# Altium PCB k02-breakout.PcbDoc
Units mil, origin at the board's own origin, x right, y up, seen from the top; angles counter-clockwise.
Board outline 600 x 2000 mil, 2 copper layers (Top Layer, Bottom Layer); 17 components, 47 nets, 130 pads, 92 vias.
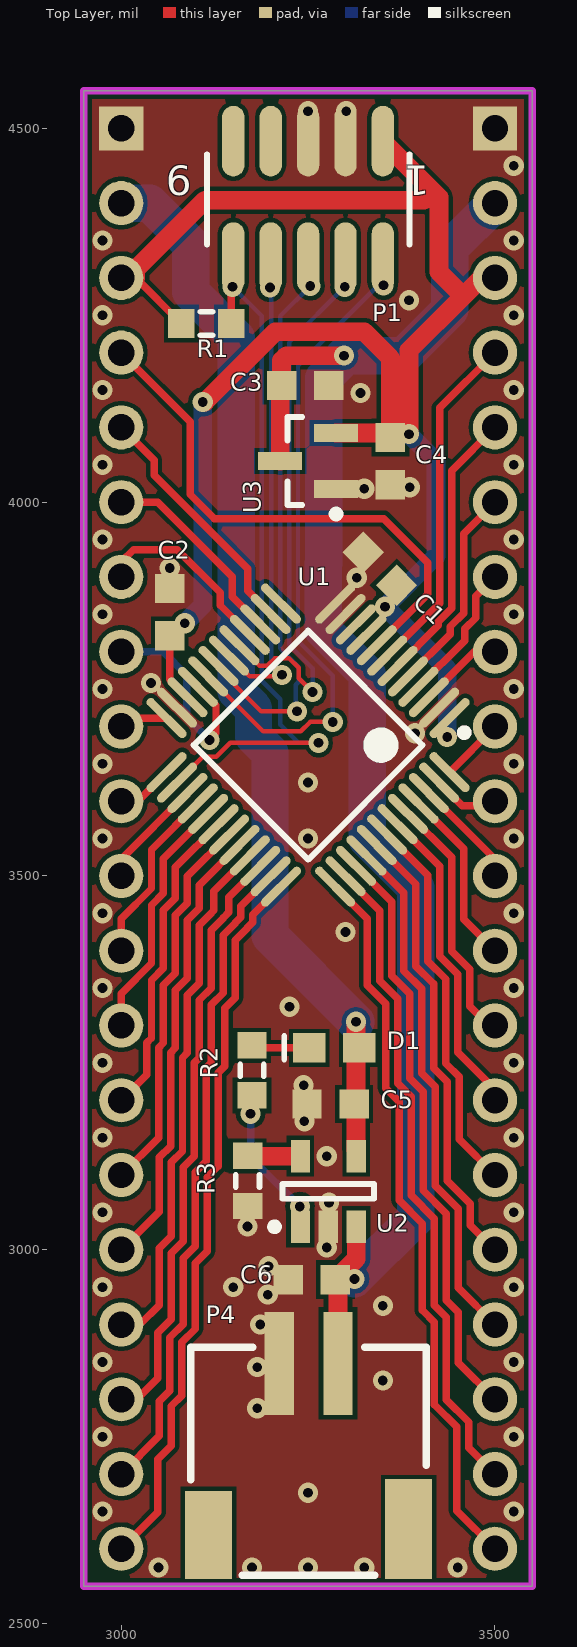
[diagram p0: Top Layer view]
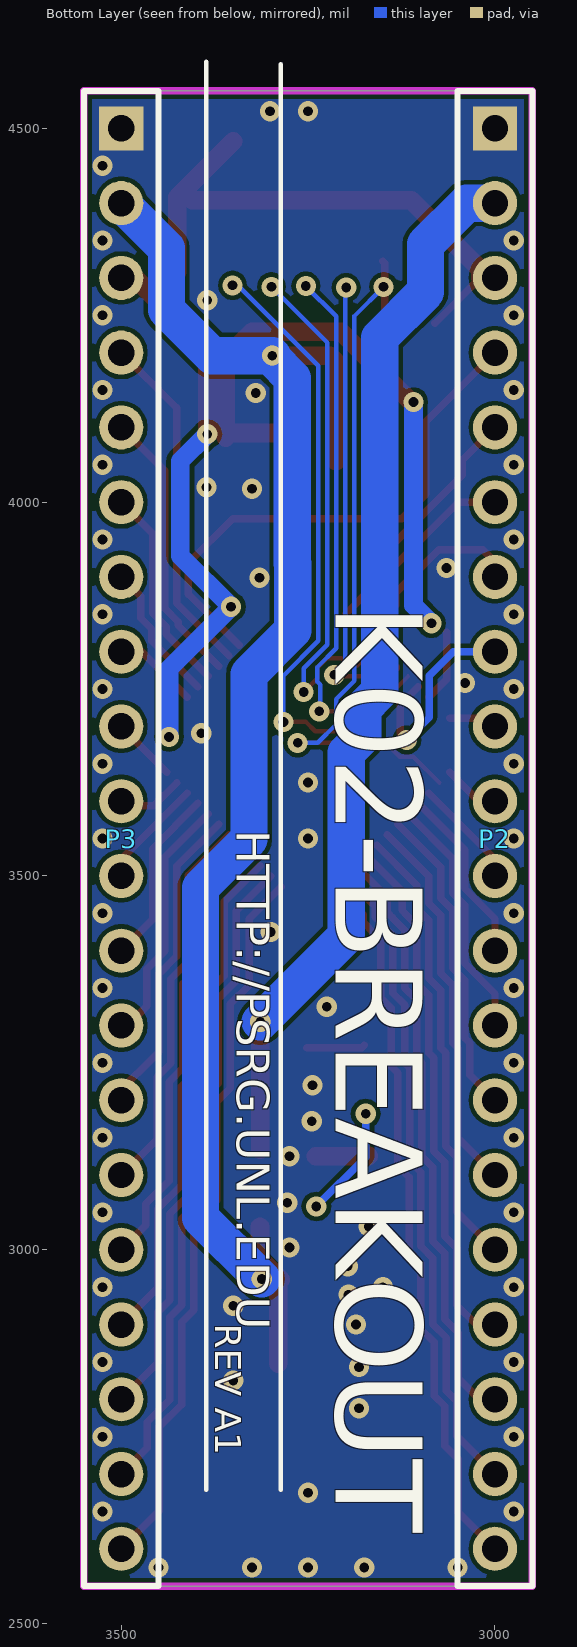
[diagram p1: Bottom Layer view, seen from below]
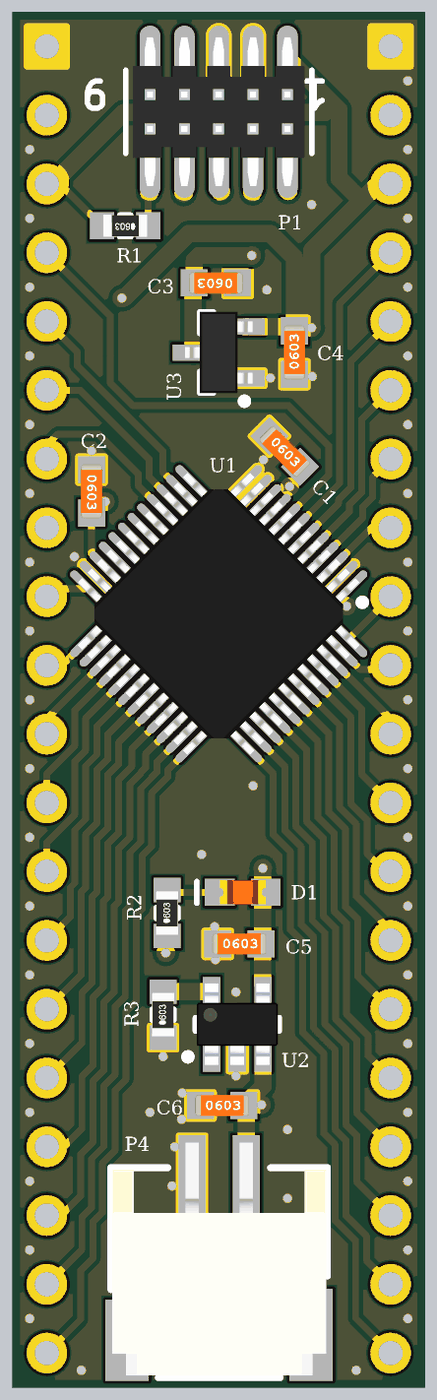
[diagram p2: 3D render of the assembled board from above, using the file's embedded part models]

## Layer stack, top to bottom
Top Solder: solder mask 0.4, Solder Resist, Dk 3.5
Top Layer: signal copper 1.4
Dielectric 1: dielectric 12.6, FR-4, Dk 4.8
Bottom Layer: signal copper 1.4
Bottom Solder: solder mask 0.4, Solder Resist, Dk 3.5

## Board outline
2950,2550 3550,2550 3550,4550 2950,4550

## Design rules (kind name [scope] priority, off if disabled: settings)
Clearance [All] p1: gap=6
PolygonConnect [All] p1: connectstyle=Direct reliefconductorwidth=10 reliefentries=4 polygonreliefangle="90 Angle" airgapwidth=10
RoutingVias [All] p1: holewidth=13 width=27 viastyle="Through Hole" minholewidth=13 minwidth=27 maxholewidth=28 maxwidth=50
SolderMaskExpansion [All] p1: expansion=4
Width [All] p1: maxlimit=200 minlimit=6 preferedwidth=10
30 further rules are at their usual default settings.

## Components (designator, comment, footprint, x,y, rotation, side; value= is the part's Value field where it differs from the comment)
C1 "100n" CAPC1608N 3346,3911 r315 top
C2 "100n" CAPC1608N 3065,3853 r270 top
C3 "4u7" CAPC1608N 3246,4156 r180 top
C4 "10u" CAPC1608N 3360,4055 r90 top
C5 "4u7" CAPC1608N 3280,3195 r0 top
C6 "4u7" CAPC1608N 3255,2960 r0 top
D1 "RED" LTST-C190EKT 3285,3270 r180 top
P1 "MHDR2X5" MHDR2X5SMD 3350,4430 r180 top
P2 "Header 20" HDR1X20 3000,4500 r270 bottom
P3 "Header 20" HDR1X20 3500,4500 r270 bottom
P4 "Header 2" S2B-PH-SM4-TB 3290,2840 r180 top
R1 "1k" RESC1608N 3114,4239 r180 top
R2 "1k" RESC1608N 3175,3240 r90 top
R3 "2k" RESC1608N 3169,3092 r90 top
U1 "MK02FN128VLF10" TSQFP50P900X900-48N 3250,3675 r225 top
U2 "MCP73831T-2ACI/OT" SOT23-5AN 3277,3078 r90 top
U3 "MCP1703T-3302E/CB" SOT23-3N 3250,4055 r180 top

## Footprints (in the part's own frame and the unit in brackets; to place one, negate y for a bottom-side part, rotate by r counter-clockwise, add the part's x,y. Pads: shape width x height; smd on the part's side, far side on the other; paste and mask are expansions set on the pad)
CAPC1608N [mm] "Chip Capacitor (0603), Body 1.6x0.8mm, IPC Medium Density"
  rect 1x1 smd: 1(-0.8,0) 2(0.8,0)
  body extent -1,-0.39 1,0.39, height 0.79
HDR1X20 [mm] "Connector; Header; 20 Position"
  rect 1.5x1.5 hole 0.9: 1(0,0)
  round 1.5 hole 0.9: 2(2.54,0) 3(5.08,0) 4(7.62,0) 5(10.16,0) 6(12.7,0) 7(15.24,0) 8(17.78,0) 9(20.32,0) 10(22.86,0) 11(25.4,0) 12(27.94,0) 13(30.48,0) 14(33.02,0) 15(35.56,0) 16(38.1,0) 17(40.64,0) 18(43.18,0) 19(45.72,0) 20(48.26,0)
  silkscreen extent -1.27,-1.27 49.53,1.27
LTST-C190EKT [mm] "Red LED, 0603"
  rect 1.1x1 smd: 1(-0.85,0) 2(0.85,0)
  silkscreen extent 1.7,-0.4 1.7,0.4, body extent -0.85,-0.45 0.85,0.45, height 0.9
MHDR2X5SMD [mm] "Connector; Header; 5x2 Position"
  oval 0.76x2.4 smd: 1(0,-1.343) 2(0,2.613) 3(1.27,-1.343) 4(1.27,2.613) 5(2.54,-1.343) 6(2.54,2.613) 7(3.81,-1.343) 8(3.81,2.613) 9(5.08,-1.343) 10(5.08,2.613)
  silkscreen extent -0.9,-0.9 5.98,2.17, body extent -0.63,-2.11 5.71,3.39, height 5.4
RESC1608N [mm] "Chip Resistor, Body 1.6x0.8mm, IPC Medium Density"
  rect 0.9x1 smd: 1(-0.85,0) 2(0.85,0)
  silkscreen extent -0.2,-0.4 0.2,0.4, body extent -0.8,-0.41 0.8,0.41, height 0.45
S2B-PH-SM4-TB [mm]
  rect 1.6x3.4 smd: 0(-2.4,5.425)
  rect 1.6x3 smd: 0(4.4,5.625)
  rect 1x3.5 smd: 1(0,-0.2) 2(2,-0.2)
  silkscreen extent -3,-0.75 5,7, body extent -2.95,-1.67 4.95,6.93, height 5.6
SOT23-3N [mm] "SOT23, 3-Leads, Body 2.9x1.3mm, Pitch 0.95mm, Lead Span 2.5mm, IPC Medium Density"
  rect 1.5x0.6 smd: 1(-0.95,0.95) 2(-0.95,-0.95) 3(0.95,0)
  silkscreen extent -1.07,-1.5 0.7,1.92, body extent -1.25,-1.5 1.25,1.5, height 0.95
SOT23-5AN [mm] "SOT23, 5-Leads, Body 2.9x1.6mm, Pitch 0.95mm, Lead Span 2.8mm, IPC Medium Density"
  rect 1.1x0.65 smd: 1(-1.2,0.95) 2(-1.2,0) 3(-1.2,-0.95) 4(1.2,-0.95) 5(1.2,0.95)
  silkscreen extent -1.32,-1.55 0.25,1.95, body extent -1.5,-1.5 1.5,1.5, height 1.3
TSQFP50P900X900-48N [mm] "Thin QFP, 48-Leads, Body 7x7mm, Pitch 0.5mm, IPC Medium Density"
  oval 1.8x0.3 smd: 1(-4.05,2.75) 2(-4.05,2.25) 3(-4.05,1.75) 4(-4.05,1.25) 5(-4.05,0.75) 6(-4.05,0.25) 7(-4.05,-0.25) 8(-4.05,-0.75) 9(-4.05,-1.25) 10(-4.05,-1.75) 11(-4.05,-2.25) 12(-4.05,-2.75) 25(4.05,-2.75) 26(4.05,-2.25) 27(4.05,-1.75) 28(4.05,-1.25) 29(4.05,-0.75) 30(4.05,-0.25) 31(4.05,0.25) 32(4.05,0.75) 33(4.05,1.25) 34(4.05,1.75) 35(4.05,2.25) 36(4.05,2.75)
  oval 0.3x1.8 smd: 13(-2.75,-4.05) 14(-2.25,-4.05) 15(-1.75,-4.05) 16(-1.25,-4.05) 17(-0.75,-4.05) 18(-0.25,-4.05) 19(0.25,-4.05) 20(0.75,-4.05) 21(1.25,-4.05) 22(1.75,-4.05) 23(2.25,-4.05) 24(2.75,-4.05) 37(2.75,4.05) 38(2.25,4.05) 39(1.75,4.05) 40(1.25,4.05) 41(0.75,4.05) 42(0.25,4.05) 43(-0.25,4.05) 44(-0.75,4.05) 45(-1.25,4.05) 46(-1.75,4.05) 47(-2.25,4.05) 48(-2.75,4.05)
  silkscreen extent -4.17,-2.75 2.75,3.57, body extent -4.5,-4.5 4.5,4.5, height 1.45

## Part data
C1 C2 C4: library part "Cap Semi", "Capacitor (Semiconductor SIM Model)"
C3 C5 C6: library part "Cap Semi", "CAP SEMI 4U7 10V 0603"
D1: library part LED_GREEN, "Typical greenGaAs LED"
P1: "Header, 5-Pin, Dual row"
P2 P3: "Header, 20-Pin"
P4: "Header, 2-Pin"
R1 R2 R3: library part "Res Semi", "Semiconductor Resistor"
U1: "IC MCU ARM 100MHz 128KB FLASH LQFP48"
U2: "IC CONTROLLR LI-ION 4.2V SOT23-5"
U3: "IC REG LDO 3.3V 0.25A SOT23A-3"

## Via types
v1: diameter 27, hole 13, Top Layer to Bottom Layer, tented both sides, 92 vias

## Nets (pads, with @x,y where several pads share a name; then routed paths per layer and width w, separated by ;. In a path a pad name is that pad's centre, name@x,y a point inside that pad or via, vN(x,y) a via of type N, cw(c..) or ccw(c..) an arc to the next point about the centre after c; other vN are vias at no path point)
3V3: C1.2 C2.2 C4.2 P1.1 P2.3 P3.3 R1.2 U1.1 U1.9 U1.10 U1.22 U3.2 | length 2431.6
  Top Layer w10: P2.3 3019.54,4300 R1.2 ; C2.2@3064.67,3826.17 3064.67,3762.89 U1.22
  Top Layer w25: P2.3@3019.54,4300 3019.54,4311.54 3112,4404 3405,4404 ; v1(3109,4134) 3112,4134 3206,4228 3325,4228 3360,4193 C4.2 3354.09,4092.4 U3.2 ; P1.1 3425,4407.87 3425,4308 3457.5,4275.5 ; v1(3385,4091) 3385,4203 3457.5,4275.5 ; P3.3 3482,4300 3457.5,4275.5
  Bottom Layer w25: v1(3085,3838) 3109,3862 v1(3109,4134) ; v1(3385,4091) 3421,4055 3421,3928 v1(3353,3860) 3436,3777 v1(3436,3686)
5V: C5.2 D1.1 P2.2 U2.4 | length 1418.5
  Top Layer w25: U2.4@3314,3133.84 v1(3314,3305)
  Bottom Layer w50: P2.2 3038,4400 3093,4345 3093,4281.07 3154,4220.07 3154,3747 3177,3724 3177,3687 3199,3665 3199,3420 v1(3314,3305)
ADC0_DM0: P2.4 U1.8 | length 721.9
  Top Layer w10: P2.4 3092.5,4107.5 3092.5,4010.27 3124.77,3978 3351,3978 3410,3919 3410,3876.76 U1.8
ADC0_DP0: P3.4 U1.7 | length 465
  Top Layer w10: U1.7 3426,3864.92 3426,4126 P3.4
DAC0_OUT: P2.5 U1.14 | length 332.4
  Top Layer w10: P2.5 3044,4056 3044,4036.14 3169,3911.14 3169,3881.27 U1.14
GND: C1.1 C2.1 C3.1 C4.1 C5.1 C6.1 P1.3 P1.5 P2.1 P3.1 P4.2 R3.1 U1.2 U1.11 U1.12 U1.23 U2.2 U3.1
  other v1: 3050,2575 3175,2575 3250,2575 3325,2575 3450,2575 2975,2650 3525,2650 3250,2675 2975,2750 3525,2750 3182,2788 3350,2825 3182,2843 2975,2850 3525,2850 3186,2900 3350,2925 3196,2940 2975,2950 3150,2950 3525,2950 3197,2978 3275,3003 3169,3031 2975,3050 3525,3050 3278,3063 3275,3125 2975,3150 3525,3150 3245,3172 3244,3220 2975,3250 3525,3250 3225,3325 2975,3350 3525,3350 3300,3425 2975,3450 3525,3450 2975,3550 3250,3550 3525,3550 3250,3625 2975,3650 3525,3650 3393,3691 2975,3750 3525,3750 3040,3758 2975,3850 3525,3850 3315,3899 3065,3912 2975,3950 3525,3950 3325,4018 3386,4020 2975,4050 3525,4050 3320,4146 2975,4150 3525,4150 2975,4250 3525,4250 3385,4270 2975,4350 3525,4350 3525,4450 3250,4523 3301,4523
JTAG_TCK: P1.4 U1.17 | length 727
  Top Layer w6: U1.17 3158.13,3807.87 3185,3781 3195.18,3781 3205.68,3791.5 3224.32,3791.5 3237.5,3778.32 3237.5,3764.5 v1(3256,3746)
  Bottom Layer w6: v1(3256,3746) 3256,3777.95 3224.5,3809.45 3224.5,4213.5 v1(3299,4288)
JTAG_TDI: P1.8 U1.18 | length 579.9
  Top Layer w6: U1.18@3164,3775 3172.16,3766.84 3212.84,3766.84 v1(3215,3769)
  Bottom Layer w6: v1(3199,4287) 3200.5,4285.5 3200.5,3783.5 v1(3215,3769)
JTAG_TDO: P1.6 U1.19 | length 730.6
  Top Layer w6: U1.19 3130.29,3776.89 3187.01,3720.17 v1(3235.17,3720.17)
  Bottom Layer w6: v1(3235.17,3720.17) 3233.5,3721.83 3233.5,3755.68 3237.5,3759.68 3237.5,3779.48 3212.5,3804.48 3212.5,4248.5 v1(3253,4289)
JTAG_TMS: P1.2 U1.20 | length 857
  Top Layer w6: U1.20 3189.74,3693.5 3240.32,3693.5 3252.82,3706 v1(3283,3706)
  Bottom Layer w6: v1(3283,3706) 3283,3767.92 3236.5,3814.42 3236.5,4182.58 3343.92,4290 v1(3351,4290)
NetD1_2: D1.2 R2.2 | length 78
  Top Layer w10: R2.2 3178.46,3270 D1.2
NetR2_1: R2.1 U2.1 | length 151.3
  Bottom Layer w10: v1(3173,3182) 3173,3124 v1(3239,3058)
NetR3_2: R3.2 U2.5 | length 70.7
  Top Layer w25: R3.2 3169.22,3125.24 U2.5
PTA4: P2.8 U1.21 | length 284.4
  Top Layer w10: U1.21 3126.8,3728.6 3126.8,3690.8 v1(3118,3682)
  Bottom Layer w10: P2.8 3056,3800 3088,3768 3088,3712 v1(3118,3682)
PTA18: P2.9 U1.24 | length 65.3
  Top Layer w10: P2.9 3011.19,3711.19 U1.24
PTA19: P2.10 U1.25 | length 76.8
  Top Layer w10: P2.10 3021.89,3600 U1.25
PTB0: P2.11 U1.27 | length 147.6
  Top Layer w10: P2.11 3000,3522.44 U1.27
PTB1: P2.12 U1.28 | length 239.5
  Top Layer w10: P2.12 3000,3442.69 3040.53,3483.21 3040.53,3529.91 3040.53,3535.12 U1.28
PTB2: P2.13 U1.29 | length 331.3
  Top Layer w10: P2.13 3000,3342.69 3040.53,3383.21 3040.53,3460.59 3056.53,3476.59 3056.53,3523.29 U1.29
PTB3: P2.14 U1.30 | length 423.2
  Top Layer w10: P2.14 3034,3234 3034,3276.69 3040.53,3283.21 3040.53,3360.59 3056.53,3376.59 3056.53,3453.96 3072.53,3469.96 3072.53,3511.45 U1.30
PTB4: P2.15 U1.31 | length 515
  Top Layer w10: P2.15 3050,3150 3050,3270.06 3056.53,3276.59 3056.53,3353.96 3072.53,3369.96 3072.53,3447.33 3088.53,3463.33 3088.53,3499.61 U1.31
PTB5: P2.16 U1.32 | length 606.9
  Top Layer w10: P2.16 3051,3051 3051,3123.51 3066,3138.51 3066,3263.43 3072.53,3269.96 3072.53,3347.33 3088.53,3363.33 3088.53,3440.7 3104.53,3456.7 3104.53,3487.77 U1.32
PTC0: P2.17 U1.33 | length 713.4
  Top Layer w10: P2.17 3025,2900 3051,2926 3051,3001.88 3067,3017.88 3067,3116.88 3082,3131.88 3082,3256.8 3088.53,3263.33 3088.53,3340.7 3104.53,3356.7 3104.53,3434.08 3120.53,3450.08 3120.53,3450.41 3124,3453.88 3124,3479.4 U1.33
PTC1: P2.18 U1.34 | length 802.9
  Top Layer w10: P2.18 3021,2800 3049,2828 3049,2889.25 3067,2907.25 3067,2995.25 3083,3011.25 3083,3110.25 3098,3125.25 3098,3250.18 3104.53,3256.7 3104.53,3334.08 3120.53,3350.08 3120.53,3427.45 3136.53,3443.45 3136.53,3443.78 3144,3451.25 3144,3471.56 U1.34
PTC2: P2.19 U1.35 | length 882.4
  Top Layer w10: P2.19 3051,2751 3051,2797.63 3065,2811.63 3065,2882.63 3083,2900.63 3083,2988.63 3099,3004.63 3099,3103.63 3114,3118.63 3114,3243.55 3120.53,3250.08 3120.53,3327.45 3136.53,3343.45 3136.53,3420.82 3152.53,3436.82 3152.53,3437.16 3160,3444.63 3160,3459.73 U1.35
PTC3: P2.20 U1.36 | length 974.3
  Top Layer w10: P2.20 3049,2649 3049,2720 3067,2738 3067,2791 3081,2805 3081,2876 3099,2894 3099,2982 3115,2998 3115,3097 3130,3112 3130,3236.92 3138.62,3245.54 3138.62,3322.91 3152.53,3336.82 3152.53,3414.19 3168.53,3430.19 3168.53,3430.53 3176,3438 3176,3447.89 U1.36
PTC4: P3.20 U1.37 | length 974.3
  Top Layer w10: U1.37 3329,3442.89 3329,3354 3354,3329 3354,3216 3372,3198 3372,3066 3403,3035 3403,2919 3419,2903 3419,2793 3449,2763 3449,2651 P3.20
PTC5: P3.19 U1.38 | length 882.4
  Top Layer w10: U1.38 3346,3453.73 3346,3359.63 3370,3335.63 3370,3222.63 3388,3204.63 3388,3072.63 3419,3041.63 3419,2925.63 3435,2909.63 3435,2799.63 3465,2769.63 3465,2735 P3.19
PTC6: P3.18 U1.39 | length 790.6
  Top Layer w10: U1.39 3362,3465.56 3362,3366.25 3386,3342.25 3386,3229.25 3404,3211.25 3404,3079.25 3435,3048.25 3435,2932.25 3451,2916.25 3451,2849 P3.18
PTC7: P3.17 U1.40 | length 698.7
  Top Layer w10: U1.40 3378,3477.4 3378,3372.88 3402,3348.88 3402,3235.88 3420,3217.88 3420,3085.88 3451,3054.88 3451,2949 P3.17
PTD0: P3.16 U1.41 | length 606.9
  Top Layer w10: U1.41 3394,3489.24 3394,3379.51 3418,3355.51 3418,3242.51 3436,3224.51 3436,3092.51 3467,3061.51 3467,3033 P3.16
PTD1: P3.15 U1.42 | length 515
  Top Layer w10: U1.42 3410,3501.08 3410,3386.14 3434,3362.14 3434,3249.14 3452,3231.14 3452,3148 P3.15
PTD2: P3.14 U1.43 | length 429.1
  Top Layer w10: U1.43 3426,3512.92 3426,3392.76 3450,3368.76 3450,3264.37 3507.19,3207.19 P3.14
PTD3: P3.13 U1.44 | length 336
  Top Layer w10: U1.44 3442,3524.76 3442,3399.39 3466,3375.39 3466,3326 3492,3300 P3.13
PTD4: P3.12 U1.45 | length 239.5
  Top Layer w10: U1.45 3458,3536.6 3458,3442 P3.12
PTD5: P3.11 U1.46 | length 147.6
  Top Layer w10: U1.46 3500,3522.44 P3.11
PTD6: P3.10 U1.47 | length 89.9
  Top Layer w10: U1.47 3456.27,3594 3494,3594 P3.10
PTD7: P3.9 U1.48 | length 86.3
  Top Layer w10: U1.48 3500,3699.51 P3.9
PTE16: P3.8 U1.3 | length 113.8
  Top Layer w10: U1.3 3472.44,3800 P3.8
PTE17: P3.7 U1.4 | length 189.5
  Top Layer w10: U1.4 3459.47,3814.88 3459.47,3830.51 3474,3845.04 3474,3874 P3.7
PTE18: P3.6 U1.5 | length 281.3
  Top Layer w10: U1.5 3440,3823.24 3440,3833.66 3458,3851.66 3458,3958 P3.6
PTE19: P3.5 U1.6 | length 373.2
  Top Layer w10: U1.6 3424,3835.08 3424,3840.29 3442,3858.29 3442,4042 P3.5
PTE24: P2.6 U1.15 | length 269.2
  Top Layer w10: P2.6 3048.83,4000 3148.8,3900.03 3148.8,3873.64 U1.15
PTE25: P2.7 U1.16 | length 256.1
  Top Layer w10: P2.7 3000,3920 3016.5,3936.5 3075.15,3936.5 3132.8,3878.85 3132.8,3861.8 U1.16
RESET: P1.10 R1.1 U1.26 | length 968.9
  Top Layer w6: U1.26 3109.23,3659.5 3127.32,3659.5 3145.82,3678 v1(3264,3678)
  Top Layer w10: R1.1 3147.46,4319.59 P1.10@3150,4322.13
  Bottom Layer w6: v1(3149,4288) 3188,4249 3188,3761.08 3212.67,3736.42 3212.67,3702.51 3237.18,3678 v1(3264,3678)
VBAT: C3.2 C6.2 P3.2 P4.1 U2.3 U3.3 | length 2089.7
  Top Layer w25: U3.3 3212.6,4154.09 C3.2 3214.5,4189.5 3221,4196 v1(3298,4196) ; P4.1 3290,2956.5 C6.2 3314.4,2987.91 U2.3
  Bottom Layer w25: v1(3298,4196) v1@3302.25,4196 ; P3.2@3500,4393.75 P3.2
  Bottom Layer w50: v1(3298,4196) 3298,4193 3271,4166 3271,3917.93 3270.5,3917.43 3270.5,3828.5 3329,3770 3329,3549 3394,3484 3394,3043 v1(3312,2961) ; v1@3302.25,4196 3378,4196 3439.47,4257.47 3439.47,4339.47 P3.2
VREF_OUT: U1.13
pads on no net: P1.7 P1.9 P4.0

## Polygon pours and split planes (outlines as drawn)
GND on Bottom Layer "BOTTOM_GND" (solid, remove dead copper, pour order 0): 2950,4550 3550,4550 3550,2550 2950,2550
GND on Top Layer "GND" (solid, remove dead copper, pour order 2): 2950,4550 3550,4550 3550,2550 2950,2550

## Keep-outs
Keep-Out Layer:
  the board outline again, w10

## Silkscreen, mask and mechanical layers (free items; w line width, h text height)
Bottom Overlay:
  lines w6: 3286.34,2678.83 3286.34,4586 ; 3386.34,2678.83 3386.34,4589
  text "K02-BREAKOUT" at 3251,3864 h200 r90
  text "HTTP://PSRG.UNL.EDU" at 3360,3561 h75 r90
  text "REV A1" at 3386.34,2900.83 h60 r90

## Text inside footprints (layer, text, board x,y; h text height)
P1: Top Overlay "1" at 3412.99,4450 h39.37 r180; Top Overlay "9" at 3094.09,4450 h39.37 r180